# Altium PCB badge.PcbDoc
Units mm, origin at the board's own origin, x right, y up, seen from the top; angles counter-clockwise.
Board outline 105.3 x 112.16 mm, 2 copper layers (Top Layer, Bottom Layer), stack 1.569 mm thick; 94 components, 67 nets, 375 pads, 2 vias.
Unrouted connection lines stored in the file: 253.
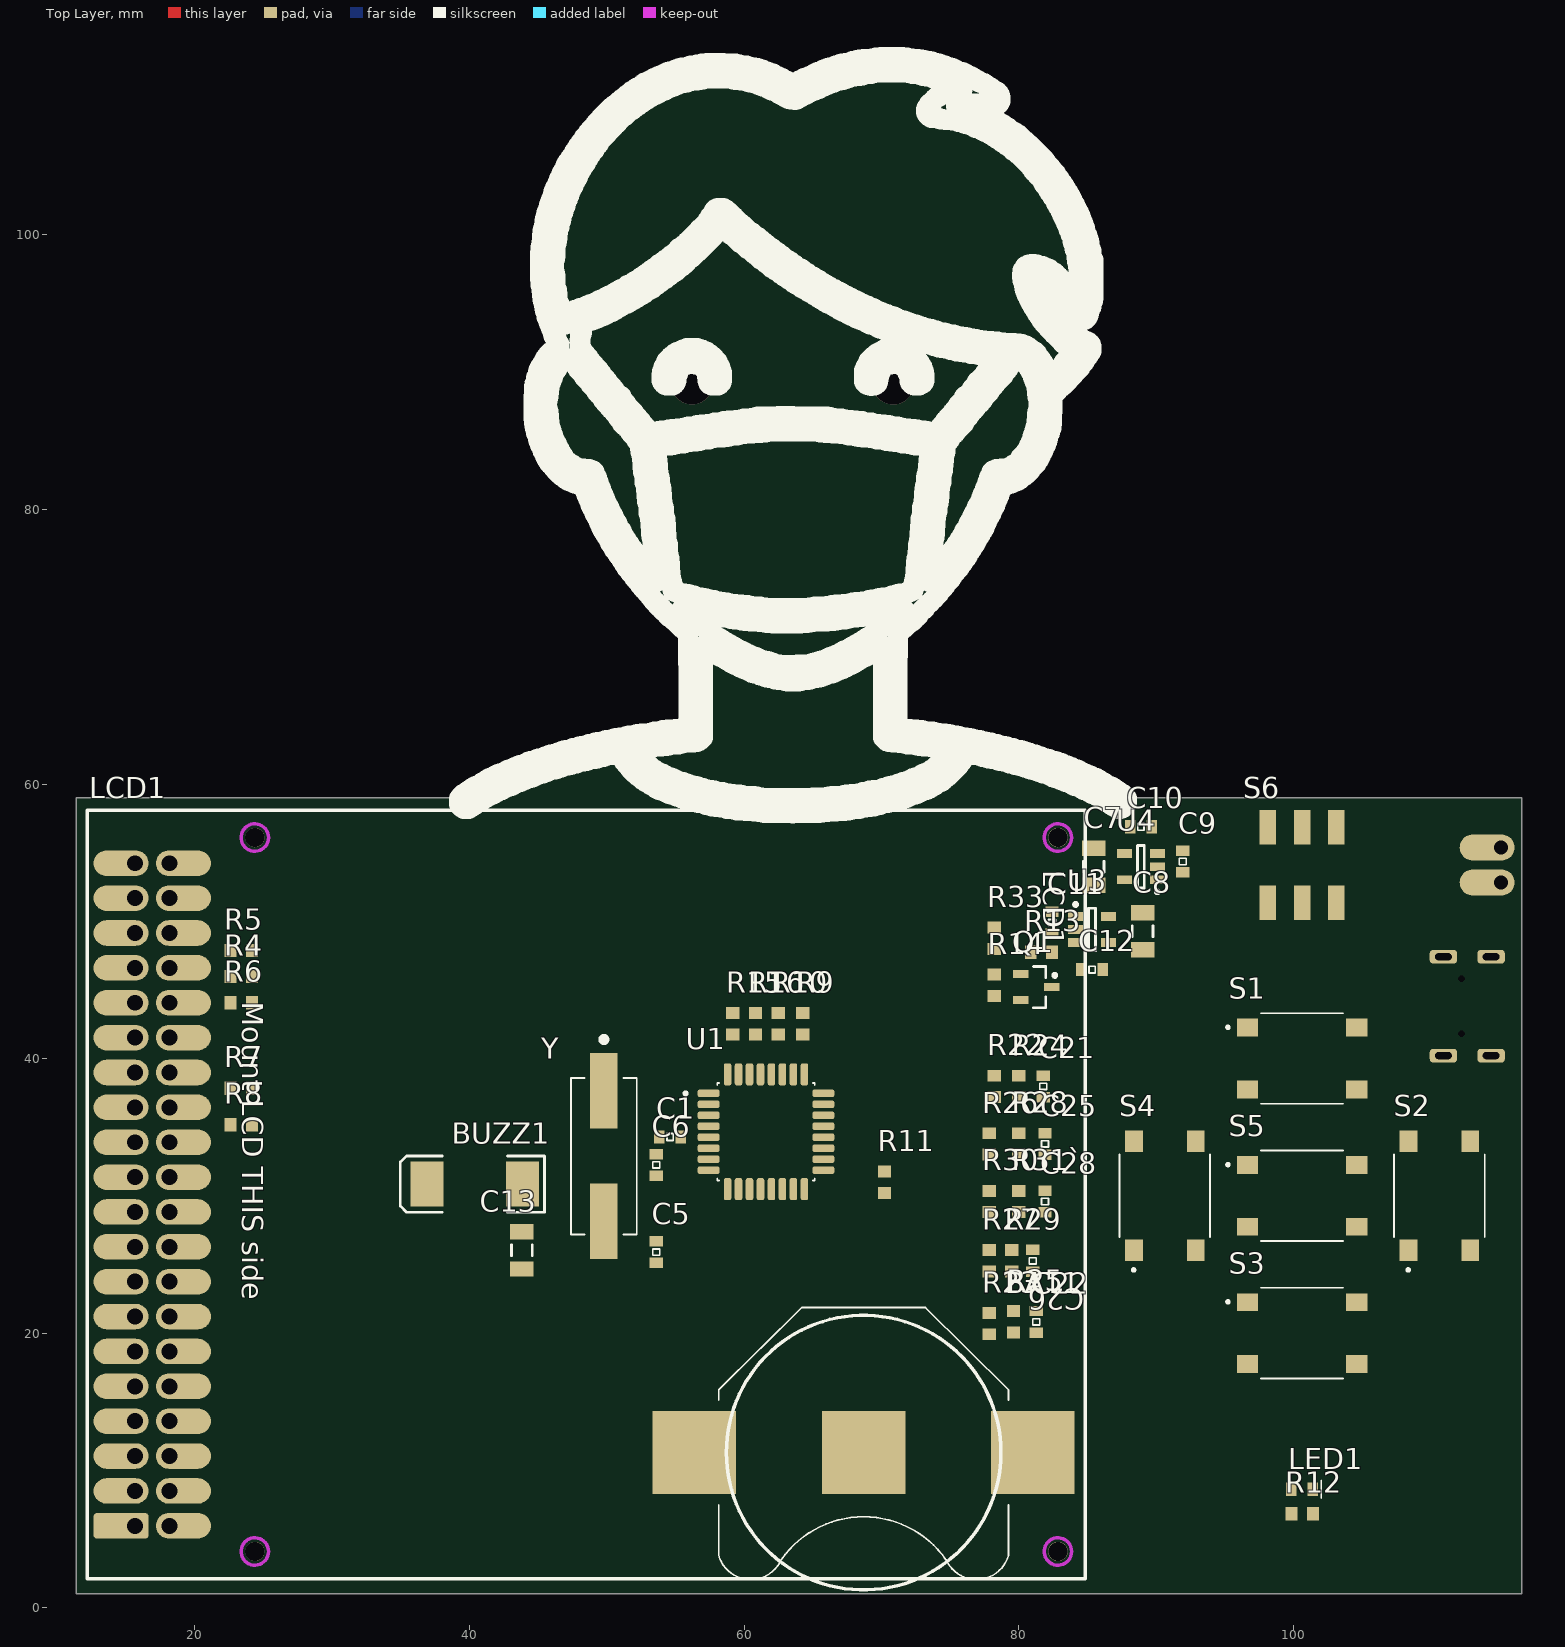
[diagram p0: Top Layer view]
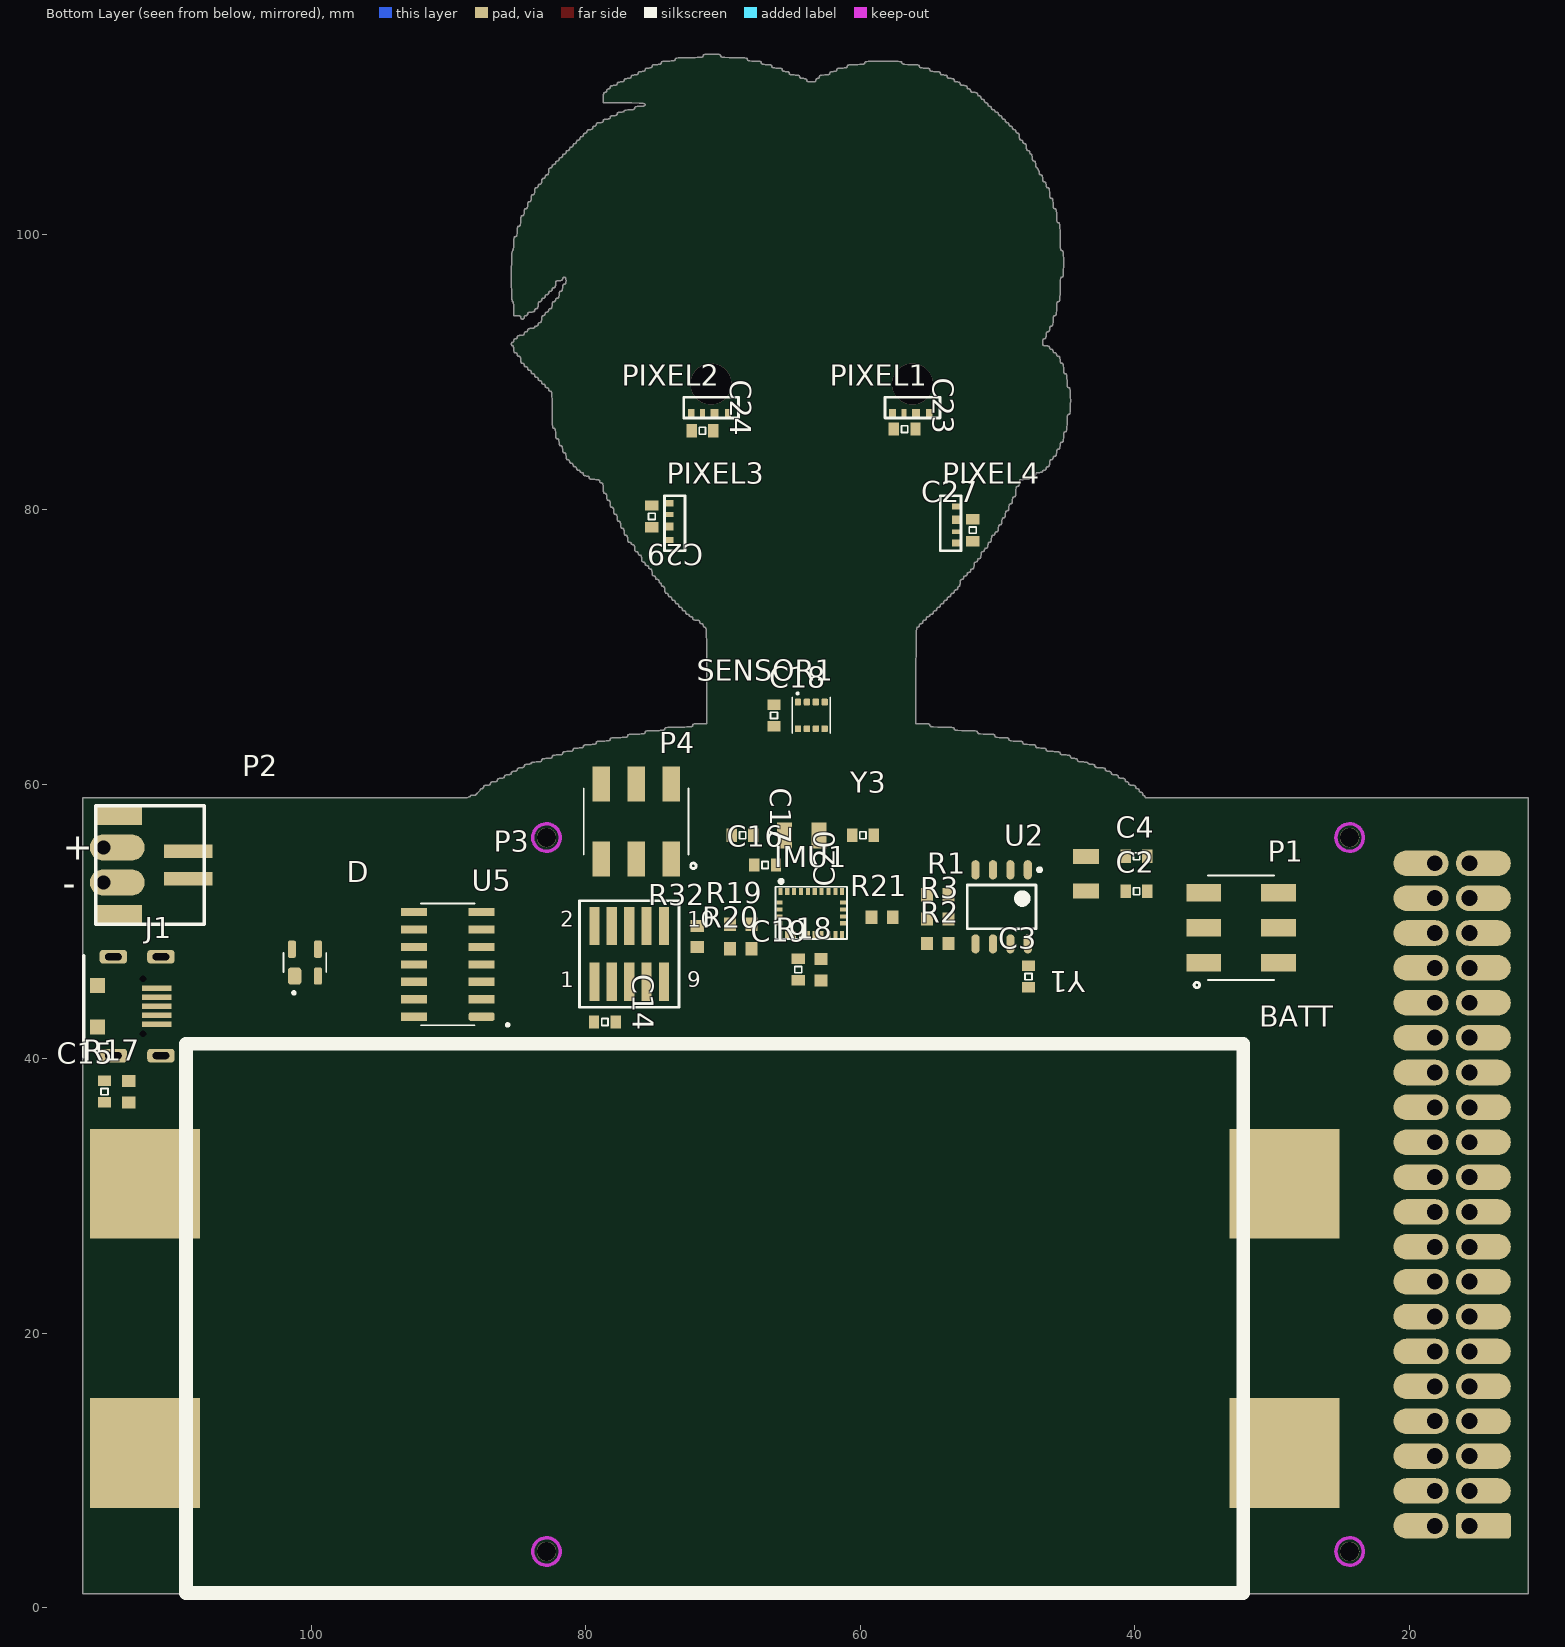
[diagram p1: Bottom Layer view, seen from below]

## Layer stack, top to bottom
Top Solder: solder mask 0.0254, SM-001, Dk 4
Top Layer: signal copper 0.035
Dielectric 1: core 1.4986, Core-043, Dk 4.3
Bottom Layer: signal copper 0.035
Bottom Solder: solder mask 0.0254, SM-001, Dk 4

## Board outline
2577 vertices, not listed, extent 11.342,1.007 116.646,113.17

## Design rules (kind name [scope] priority, off if disabled: settings)
Clearance [All] p1: gap=0.254 ignorepadtopadclearanceinfootprint=FALSE except(0: Arc-Hole Track-Hole SMDPad-Hole THPad-Hole Via-Hole Fill-Hole Poly-Hole Region-Hole Text-Hole; 0.18: SMDPad-SMDPad)
DiffPairsRouting [All] p1: maxlimit=0.254 minlimit=0.254 mostfreqgap=0.254 toplayer_minwidth=0.381 toplayer_maxwidth=0.381 toplayer_prefwidth=0.381 bottomlayer_minwidth=0.381 bottomlayer_maxwidth=0.381 bottomlayer_prefwidth=0.381 maxuncoupledlength=12.7
PolygonConnect [All] p1: connectstyle=Relief reliefconductorwidth=0.254 reliefentries=4 polygonreliefangle="90 Angle" airgapwidth=0.254
RoutingVias [All] p1: holewidth=0.711 width=1.27 viastyle="Through Hole" minholewidth=0.711 minwidth=1.27 maxholewidth=0.711 maxwidth=1.27
SolderMaskExpansion [All] p1: expansion=0.102 istentingtop=FALSE
Width [All] p1: maxlimit=0.254 minlimit=0.254 preferedwidth=0.254
29 further rules are at their usual default settings.

## Classes and differential pairs
component class badge: BAT1 C1 C2 C3 C4 C5 C6 LCD1 LED1 P1 R1 R2 R3 R4 R5 R6 R7 R8 R9 R10 R11 R12 U1 U2 Y Y1
component class badge5: C21 C22 C23 C24 C25 C26 C27 C28 C29 PIXEL1 PIXEL2 PIXEL3 PIXEL4 R22 R23 R24 R25 R26 R27 R28 R29 R30 R31` S1 S2 S3 S4 S5
component class badge4: C16 C17 C18 C19 C20 IMU1 R18 R19 R20 R21 SENSOR1 Y3
component class badge3: C14 C15 D J1 P3 P4 R15 R16 R17 R32 U5
component class badge2: BATT BUZZ1 C7 C8 C9 C10 C11 C12 C13 P2 Q1 R13 R14 R33 S6 U3 U4
differential pair USB_D: +USB_D_P -USB_D_N

## Components (designator, comment, footprint, x,y, rotation, side; value= is the part's Value field where it differs from the comment)
BAT1 "BK-883" BAT_BK-883 68.707,11.303 r180 top
BATT "BATT_18650x2" BATT_18650x2 70.612,21.082 r0 bottom locked
BUZZ1 "Speaker" SMC 40.386,30.861 r180 top
C1 "Cap" C0603 54.61,34.29 r0 top value=0.1uF
C2 "Cap" C0603 39.878,52.197 r0 bottom value=10pF
C3 "Cap" C0603 47.752,45.974 r90 bottom value=0.1uF
C4 "Cap" C0603 39.878,54.737 r0 bottom value=10pF
C5 "Cap" C0603 53.594,25.908 r270 top value=18pF
C6 "Cap" C0603 53.594,32.258 r270 top value=18pF
C7 "Cap1206" C1206 85.471,53.975 r270 top value=10uF
C8 "Cap1206" C1206 89.027,49.276 r90 top value=10uF
C9 "Cap0603" C0603 91.948,54.356 r90 top value=0.1uF
C10 "Cap0603" C0603 88.9,56.896 r180 top locked value=470pF
C11 "Cap0603" C0603 82.423,49.911 r90 top value=0.1uF
C12 "Cap0603" C0603 85.344,46.482 r0 top value=470pF
C13 "Cap1206" C1206 43.815,26.035 r270 top value=10uF
C14 "Cap0603" C0603 78.613,42.672 r180 bottom value=0.1uF
C15 "Cap0603" C0603 115.062,37.592 r90 bottom value=4.7nF
C16 "Cap0603" C0603 66.929,54.102 r180 bottom value=0.1uF
C17 "Cap" C0603 68.58,56.261 r180 bottom value=10pF
C18 "Cap0603" C0603 66.294,65 r270 bottom value=0.1uF
C19 "Cap0603" C0603 64.516,46.482 r90 bottom value=0.1uF
C20 "Cap" C0603 59.817,56.261 r0 bottom value=10pF
C21 "Cap0603" C0603 81.788,37.973 r90 top value=0.1uF
C22 "Cap0603" C0603 81.28,20.828 r90 top value=0.1uF
C23 "Cap0603" C0603 56.769,85.852 r180 bottom value=0.1uF
C24 "Cap0603" C0603 71.501,85.725 r180 bottom value=0.1uF
C25 "Cap0603" C0603 81.915,33.782 r270 top value=0.1uF
C26 "Cap0603" C0603 81.026,25.273 r270 top value=0.1uF
C27 "Cap0603" C0603 51.816,78.486 r90 bottom value=0.1uF
C28 "Cap0603" C0603 81.915,29.591 r90 top value=0.1uF
C29 "Cap0603" C0603 75.184,79.502 r270 bottom value=0.1uF
D "PRTR5V0U2X" SOT190P230X110-4N 100.457,46.99 r90 bottom
IMU1 "BNO055" LGA28R50P4X10_380X520X100 63.571,50.611 r180 bottom
J1 "MICROUSB_TAOBAO" MICROUSB_TAOBAO 116.562,43.815 r270 bottom
LCD1 "ER-TFTM024-3" ER-TFTM024-3 15.621,5.969 r270 top locked
LED1 "Blue" L0603 100.646,8.636 r0 top
P1 "95278-101A06LF" AMPHENOL_95278-101A06LF 32.258,49.53 r90 bottom
P2 "PWRIN" PWRIN 112.014,54.102 r180 bottom
P3 "SAMTEC-FTSH-105-01-X-DVJ" SAMTEC-FTSH-105-01-X-DV 76.835,47.625 r180 bottom
P4 "95278-101A06LF" AMPHENOL_95278-101A06LF 76.327,57.277 r0 bottom
PIXEL1 "WS2182B" WS2812B_SIDE 56.202,88.17 r0 bottom locked
PIXEL2 "WS2182B" WS2812B_SIDE 70.866,88.17 r0 bottom locked
PIXEL3 "WS2182B" WS2812B_SIDE 72.771,79 r90 bottom
PIXEL4 "WS2182B" WS2812B_SIDE 54.175,79 r270 bottom
Q1 "BSS138" SOT23_N 81.28,45.212 r0 top
R1 "Res" R0603 54.356,51.943 r180 bottom value=10k0
R2 "Res" R0603 54.356,48.387 r180 bottom value=4k75
R3 "Res" R0603 54.356,50.165 r180 bottom value=4k75
R4 "Res" R0603 23.386,45.974 r180 top value=22R
R5 "Res" R0603 23.368,47.879 r180 top value=22R
R6 "Res" R0603 23.368,44.069 r180 top value=22R
R7 "Res" R0603 23.368,37.846 r180 top value=22R
R8 "Res" R0603 23.368,35.179 r180 top value=22R
R9 "Res" R0603 64.262,42.545 r90 top value=22R
R10 "Res" R0603 62.484,42.545 r90 top value=10k
R11 "Res" R0603 70.231,30.988 r270 top value=10k
R12 "Res" R0603 100.646,6.858 r0 top value=470R
R13 "Res" R0603 81.661,47.752 r0 top value=100K
R14 "Res" R0603 78.232,45.339 r90 top value=100K
R15 "Res" R0603 59.182,42.545 r90 top value=1K
R16 "Res" R0603 60.833,42.545 r270 top value=1K
R17 "Res" R0603 113.284,37.592 r90 bottom value=1M
R18 "Res" R0603 62.865,46.482 r270 bottom value=10K
R19 "Res" R0603 68.707,49.784 r180 bottom value=10K
R20 "Res" R0603 68.707,48.006 r180 bottom value=10K
R21 "Res" R0603 58.42,50.292 r0 bottom value=10K
R22 "Res" R0603 78.232,37.973 r270 top value=12.1k
R23 "Res" R0603 77.851,20.701 r270 top value=12.1k
R24 "Res" R0603 80.01,37.973 r90 top value=43k
R25 "Res" R0603 79.629,20.828 r90 top value=43k
R26 "Res" R0603 77.851,33.782 r90 top value=12.1k
R27 "Res" R0603 77.851,25.273 r90 top value=12.1k
R28 "Res" R0603 80.01,33.782 r270 top value=43k
R29 "Res" R0603 79.502,25.273 r270 top value=43k
R30 "Res" R0603 77.851,29.591 r270 top value=12.1k
R31` "Res" R0603 80.01,29.591 r90 top value=43k
R32 "Res" R0603 71.882,48.895 r270 bottom value=10k
R33 "Res" R0603 78.232,48.768 r270 top value=0R
S1 "B3S-1000P" SW_B3S-1000P 100.646,40.007 r0 top locked
S2 "B3S-1000P" SW_B3S-1000P 110.646,30.007 r90 top locked
S3 "B3S-1000P" SW_B3S-1000P 100.646,20.007 r0 top locked
S4 "B3S-1000P" SW_B3S-1000P 90.646,30.007 r90 top locked
S5 "B3S-1000P" SW_B3S-1000P 100.646,30.007 r0 top locked
S6 "JS202011SCQN" SW_JS202011SCQN 100.646,54.102 r0 top locked
SENSOR1 "BME280" PSON65P250X250X100-8N 63.571,65 r90 bottom
U1 "ATMEGA328P-AUR" QFP80P900X900X120-32N 61.595,34.671 r0 top
U2 "MCP7940MT-I/SN" SOIC127P600X175-8N 49.704,51.054 r270 bottom
U3 "MIC5219BM5" SOT23-5_N 85.344,49.403 r0 top
U4 "MIC5219BM5" SOT23-5_N 88.9,53.975 r180 top
U5 "ATSAMD11C14A" SOIC127P600X175-14N 90.043,46.863 r0 bottom
Y "ABM3-16.000MHZ-B2-T" XTAL_ECS-100-20-5PVX 49.784,32.893 r270 top
Y1 "MC-405_32.7680K-D:_ROHS" XTAL320X150 43.561,53.467 r270 bottom
Y3 "MC-405_32.7680K-D:_ROHS" XTAL320X150 64.262,56.261 r0 bottom

## Footprints (in the part's own frame and the unit in brackets; to place one, negate y for a bottom-side part, rotate by r counter-clockwise, add the part's x,y. Pads: shape width x height; smd on the part's side, far side on the other; paste and mask are expansions set on the pad)
AMPHENOL_95278-101A06LF [mm]
  rect 1.27x2.54 smd: 1(-2.54,2.73) 2(-2.54,-2.73) 3(0,2.73) 4(0,-2.73) 5(2.54,2.73) 6(2.54,-2.73)
  silkscreen extent -4.37,-2.41 3.81,3.43, body extent -3.18,-1.71 3.17,1.72, height 5.8
BAT_BK-883 [mm]
  rect 6.07x6.07 smd paste-4: NEG(0,0)
  rect 6.07x6.07 smd: S1+(-12.33,0) S2+(12.33,0)
  silkscreen extent -10.56,-10.57 10.56,10, body extent -15.37,-10.41 15.36,9.4, height 3.96
BATT_18650x2 [mm]
  rect 8x8 smd: NEG1(41.5,9.8) NEG2(-41.5,-9.8) POS1(-41.5,9.8) POS2(41.5,-9.8)
  silkscreen extent -38.5,-20 38.5,20, body extent -43.1,-19.8 43.1,19.8, height 15
C0603 [mil]
  rect 30x38 smd: 1(-31,0) 2(31,0)
  silkscreen extent -9,-10 9,10, body extent -31,-16 31,16, height 36
C1206 [mm] "Chip Capacitor, Body 3.2x1.6mm, IPC High Density"
  rect 1.1x1.7 smd: 1(-1.35,0) 2(1.35,0)
  silkscreen extent -0.4,-0.75 0.4,0.75, body extent -1.7,-0.9 1.7,0.9, height 1.3
ER-TFTM024-3 [mm] "ER-TFTM024-3 TFT LCD Module"
  rrect25% 1.86x4 hole 1.16 copper offset 0,-1: 1(0,0)
  oval 1.86x4 hole 1.16 copper offset 0,1: 2(0,2.54) 4(-2.54,2.54) 6(-5.08,2.54) 8(-7.62,2.54) 10(-10.16,2.54) 12(-12.7,2.54) 14(-15.24,2.54) 16(-17.78,2.54) 18(-20.32,2.54) 20(-22.86,2.54) 22(-25.4,2.54) 24(-27.94,2.54) 26(-30.48,2.54) 28(-33.02,2.54) 30(-35.56,2.54) 32(-38.1,2.54) 34(-40.64,2.54) 36(-43.18,2.54) 38(-45.72,2.54) 40(-48.26,2.54)
  oval 1.86x4 hole 1.16 copper offset 0,-1: 3(-2.54,0) 5(-5.08,0) 7(-7.62,0) 9(-10.16,0) 11(-12.7,0) 13(-15.24,0) 15(-17.78,0) 17(-20.32,0) 19(-22.86,0) 21(-25.4,0) 23(-27.94,0) 25(-30.48,0) 27(-33.02,0) 29(-35.56,0) 31(-38.1,0) 33(-40.64,0) 35(-43.18,0) 37(-45.72,0) 39(-48.26,0)
  round 1.41 hole 1.4: H1(1.87,8.74) H2(1.87,67.24) H3(-50.13,8.74) H4(-50.13,67.24)
  Keep-Out Layer circle w0.254: c1.87,67.24 r1
  Keep-Out Layer circle w0.254: c1.87,8.74 r1
  Keep-Out Layer circle w0.254: c-50.13,8.74 r1
  Keep-Out Layer circle w0.254: c-50.13,67.24 r1
  silkscreen extent -52.13,-3.46 3.87,69.24, body extent -52.13,-3.46 3.87,69.24, height 12.6
L0603 [mil]
  rect 30x38 smd: 1(-31,0) 2(31,0)
  silkscreen extent 55,-25 55,25
LGA28R50P4X10_380X520X100 [mm]
  rect 0.3x0.525 smd: 1(-2.25,1.562) 6(-2.25,-1.562) 7(-1.75,-1.562) 8(-1.25,-1.562) 9(-0.75,-1.562) 10(-0.25,-1.562) 11(0.25,-1.562) 12(0.75,-1.562) 13(1.25,-1.562) 14(1.75,-1.562) 15(2.25,-1.562) 20(2.25,1.562) 21(1.75,1.562) 22(1.25,1.562) 23(0.75,1.562) 24(0.25,1.562) 25(-0.25,1.562) 26(-0.75,1.562) 27(-1.25,1.562) 28(-1.75,1.562)
  rect 0.425x0.3 smd: 2(-2.312,0.75) 3(-2.312,0.25) 4(-2.312,-0.25) 5(-2.312,-0.75) 16(2.312,-0.75) 17(2.312,-0.25) 18(2.312,0.25) 19(2.312,0.75)
  silkscreen extent -2.6,-1.9 2.6,2.4, body extent -2.6,-1.9 2.6,1.9, height 1.18
MICROUSB_TAOBAO [mm]
  rect 0.4x2.15 smd: 1(-1.3,5.31) 2(-0.65,5.31) 3(0,5.31) 4(0.65,5.31) 5(1.3,5.31)
  round 0 hole 0.5: H1(-2,4.3) H2(2,4.3)
  rrect50% 1x2 hole 0.5 slot 1.2 at 90 deg: S1(-3.6,2.15) S2(3.6,2.15) S3(-3.6,5.62) S4(3.6,5.62)
  rect 1.1x1.1 smd: S5(-1.5,1) S6(1.5,1)
  silkscreen extent -3.68,0 3.68,0
PSON65P250X250X100-8N [mm]
  rrect25% 0.49x0.45 smd: 1(0.97,0.975) 2(0.97,0.325) 3(0.97,-0.325) 4(0.97,-0.975) 5(-0.97,-0.975) 6(-0.97,-0.325) 7(-0.97,0.325) 8(-0.97,0.975)
  silkscreen extent -1.3,-1.39 1.65,1.39, body extent -1.25,-1.25 1.25,1.25, height 1
PWRIN [mm]
  oval 4x1.905 hole 1.016 copper offset 1,0: 1(-3.111,1.27) 2(-3.111,-1.27)
  rect 3.5x1 smd: 1(3.06,1) 2(3.06,-1)
  rect 3.4x1.4 smd: 3(-2.02,-3.62) 3(-2.02,3.62)
  silkscreen extent -3.69,-4.31 4.21,4.31
QFP80P900X900X120-32N [mm]
  rrect53% 1.6x0.55 smd: 1(-4.18,2.8) 2(-4.18,2) 3(-4.18,1.2) 4(-4.18,0.4) 5(-4.18,-0.4) 6(-4.18,-1.2) 7(-4.18,-2) 8(-4.18,-2.8) 17(4.18,-2.8) 18(4.18,-2) 19(4.18,-1.2) 20(4.18,-0.4) 21(4.18,0.4) 22(4.18,1.2) 23(4.18,2) 24(4.18,2.8)
  rrect53% 0.55x1.6 smd: 9(-2.8,-4.18) 10(-2,-4.18) 11(-1.2,-4.18) 12(-0.4,-4.18) 13(0.4,-4.18) 14(1.2,-4.18) 15(2,-4.18) 16(2.8,-4.18) 25(2.8,4.18) 26(2,4.18) 27(1.2,4.18) 28(0.4,4.18) 29(-0.4,4.18) 30(-1.2,4.18) 31(-2,4.18) 32(-2.8,4.18)
  silkscreen extent -5.95,-3.55 3.55,3.55, body extent -4.5,-4.5 4.5,4.5, height 1.2
R0603 [mm]
  rect 0.87x0.97 smd: 1(-0.78,0) 2(0.78,0)
  body extent -0.75,-0.4 0.75,0.4, height 0.5
SAMTEC-FTSH-105-01-X-DV [mil]
  rect 29.13x109.84 smd: 1(-100,-80) 2(-100,80) 3(-50,-80) 4(-50,80) 5(0,-80) 6(0,80) 7(50,-80) 8(50,80) 9(100,-80) 10(100,80)
  silkscreen extent -143,-153 143,153, body extent -130,-118 130,118, height 185
SMC [mm] "DO-214-AB/SMC; 2 C-Bend Leads; Body 7.9 x 5.9 mm, inc. leads (LxW)"
  rect 2.4x3.3 smd: 1(-3.475,0) 2(3.475,0)
  silkscreen extent -5.07,-2.05 5.43,2.05
SOIC127P600X175-8N [mm] "SOIC, 8-Leads, Body 4.90x3.90mm, Pitch 1.27mm, IPC Medium Density"
  oval 1.4x0.6 smd: 1(-2.7,1.905) 2(-2.7,0.635) 3(-2.7,-0.635) 4(-2.7,-1.905) 5(2.7,-1.905) 6(2.7,-0.635) 7(2.7,0.635) 8(2.7,1.905)
  silkscreen extent -2.82,-2.5 1.6,2.88, body extent -2,-2.5 2,2.5, height 1.75
SOIC127P600X175-14N [mm]
  rrect50% 1.9x0.6 smd: 1(-2.455,3.81)
  rect 1.9x0.6 smd: 2(-2.455,2.54) 3(-2.455,1.27) 4(-2.455,0) 5(-2.455,-1.27) 6(-2.455,-2.54) 7(-2.455,-3.81) 8(2.455,-3.81) 9(2.455,-2.54) 10(2.455,-1.27) 11(2.455,0) 12(2.455,1.27) 13(2.455,2.54) 14(2.455,3.81)
  silkscreen extent -4.45,-4.43 1.95,4.51
SOT23-5_N [mm] "SOT23, 6-Leads, Body 2.9x1.6mm, Pitch 0.95mm, Lead Span 2.7mm, IPC Medium Density"
  rect 1.1x0.65 smd: 1(-1.2,0.95) 2(-1.2,0) 3(-1.2,-0.95) 4(1.2,-0.95) 5(1.2,0.95)
  silkscreen extent -1.32,-1.55 0.25,1.95, body extent -1.4,-1.55 1.4,1.55, height 1.45
SOT23_N [mm] "SOT23, 3-Leads, Body 2.9x1.3mm, Pitch 0.95mm, Lead Span 2.3mm - Reverse Pinning, IPC Medium Density"
  rect 1.15x0.6 smd: 1(1.125,0) 2(-1.125,-0.95) 3(-1.125,0.95)
  silkscreen extent -0.2,-1.5 1.48,1.5, body extent -1.2,-1.5 1.2,1.5, height 1.2
SOT190P230X110-4N [mm]
  rrect50% 1.26x0.99 smd: 1(-0.98,0.75)
  rrect50% 1.26x0.59 smd: 2(-0.98,-0.95) 3(0.98,-0.95) 4(0.98,0.95)
  silkscreen extent -2.3,-1.56 0.7,1.56, body extent -1.02,-1.45 1.28,1.45, height 1.1
SW_B3S-1000P [mm]
  rect 1.55x1.3 smd: 1(-3.975,2.25) 2(3.975,2.25) 3(-3.975,-2.25) 4(3.975,-2.25)
  silkscreen extent -5.5,-3.3 3,3.3
SW_JS202011SCQN [mm]
  rect 1.2x2.5 smd: 1(-2.5,-2.75) 2(0,-2.75) 3(2.5,-2.75) 4(-2.5,2.75) 5(0,2.75) 6(2.5,2.75)
  body extent -4.5,-3.75 4.5,3.75, height 5.51
WS2812B_SIDE [mm]
  rect 0.45x0.65 smd: 1(-1.225,1.175)
  rect 0.6x0.65 smd: 2(-0.25,1.175)
  rect 0.35x0.65 smd: 3(0.625,1.175)
  rect 0.5x0.65 smd: 4(1.45,1.175)
  silkscreen extent -2,0 2,1.5
XTAL320X150 [mm]
  rect 1.1x1.9 smd: 1(-1.25,0) 2(1.25,0)
XTAL_ECS-100-20-5PVX [mm]
  rect 5.5x2 smd: 1(-4.75,0) 2(4.75,0)
  silkscreen extent -8.7,-2.4 5.7,2.4

## Part data
BAT1: "Battery Retainer Coin, 20.0mm 1 Cell SMD _SMT_ Tab", Package=None, Availability=Unavailable, MF="MPD _Memory", MP=BK-883-TR, Price=None, SnapEDA_Link=https://www.snapeda.com/parts/BK-883-TR/MPD%20%28Memory%20Protection%20Devices%29/view-part/386772/?ref=snap
BUZZ1: "Loudspeaker", LatestRevisionDate=17-Jul-2002, LatestRevisionNote="Re-released for DXP Platform.", PackageReference=PIN2, Published=24-Mar-1999, Publisher="Altium Limited"
C1 C2 C3 C4 C5 C6 C7 C8 C9 C10 C11 C12 C13 C14 C15 C16 C17 C18 C19 C20 C21 C22 C23 C24 C25 C26 C27 C28 C29: "Capacitor", LatestRevisionDate=17-Jul-2002, LatestRevisionNote="Re-released for DXP Platform.", PackageDescription="SMD Capacitor", Published=8-Jun-2000, Publisher="Altium Limited"
  C1 C2 C3 C4 C5 C6 C17 C20: PackageReference=RAD-0.3
  C7 C8 C13: PackageReference=1206
  C9 C10 C11 C12 C14 C15 C16 C18 C19 C21 C22 C23 C24 C25 C26 C27 C28 C29: PackageReference=0603
D: "Clamp Ipp Tvs Diode Surface Mount SOT-143B", Package="SOT-143 NXP Semiconductors", Availability=Unavailable, MF="NXP Semiconductors", MP=PRTR5V0U2X, Price=None, SnapEDA_Link=https://www.snapeda.com/parts/PRTR5V0U2X/NXP%20Semiconductors/view-part/4254511/?ref=snap
IMU1: "Accelerometer, Gyroscope, Magnetometer, 9 Axis Sensor IÂ²C, UART Output", Package="LGA-28 Bosch", Digi-Key_Part_Number=828-1058-1-ND, Digi-Key_Purchase_URL=https://www.digikey.com/product-detail/en/bosch-sensortec/BNO055/828-1058-1-ND/6136309?utm_source=snapeda&utm_medium=aggregator&utm_campaign=symbol, MF=Bosch, MP=BNO055, SnapEDA_Link=https://www.snapeda.com/parts/BNO055/Bosch%20Sensortec/view-part/51961/?ref=snap
LED1: library part LED, "Typical INFRARED GaAs LED", LatestRevisionDate=08-Jul-2005, LatestRevisionNote="Mech Layer 1 removed.", PackageDescription="LED; 2 Leads", PackageReference=LED-0, Published=8-Jun-2000, Publisher="Altium Limited"
P1 P4: "Connector Header Surface Mount 6 position 0.100 _2.54mm_", Package=None, Availability=Unavailable, MF="Amphenol ICC", MP=95278-101A06LF, Price=None, SnapEDA_Link=https://www.snapeda.com/parts/95278-101A06LF/Amphenol%20FCI/view-part/2763224/?ref=snap
Q1: library part MOSFET-N, "N-Channel MOSFET", LatestRevisionDate=17-Jul-2002, LatestRevisionNote="Re-released for DXP Platform.", PackageDescription="TO, Flat Index; 3 In-Line, Axial Leads; Body Dia. 4.6mm; Lead Dia. 0.5 mm (max)", PackageReference=E3, PackageVersion=1995/1996, Published=8-Jun-2000, Publisher="Altium Limited"
R1 R2 R3 R4 R5 R6 R7 R8 R9 R10 R11 R12 R13 R14 R15 R16 R17 R18 R19 R20 R21 R22 R23 R24 R25 R26 R27 R28 R29 R30 R31` R32 R33: "Resistor", LatestRevisionDate=17-Jul-2002, LatestRevisionNote="Re-released for DXP Platform.", PackageReference=AXIAL-0.4, Published=8-Jun-2000, Publisher="Altium Limited"
  R1 R2 R3 R4 R5 R6 R7 R8 R9: PackageDescription="Axial Device, Thru-Hole; 2 Leads; 0.4 in Pin Spacing"
  R10 R11 R12 R13 R14 R15 R16 R17 R18 R19 R20 R21 R22 R23 R24 R25 R26 R27 R28 R29 R30 R31` R32 R33: PackageDescription="SMD Resistor"
S1 S2 S3 S4 S5: "Tactile Switch SPST-NO Top Actuated Surface Mount", Package="SMD-4 Omron Electronics Inc-EMC Div", Availability=Unavailable, MF="Omron Electronics", MP=B3S-1000P, Price=None, SnapEDA_Link=https://www.snapeda.com/parts/B3S-1000P/Omron%20Electronics%20Inc-EMC%20Div/view-part/273491/?ref=snap
S6: "Slide Switch DPDT Surface Mount", Package=None, Digi-Key_Part_Number=401-2002-1-ND, Digi-Key_Purchase_URL=https://www.digikey.com/product-detail/en/c-k/JS202011SCQN/401-2002-1-ND/1640098?utm_source=snapeda&utm_medium=aggregator&utm_campaign=symbol, MF=C&K, MP=JS202011SCQN, SnapEDA_Link=https://www.snapeda.com/parts/JS202011SCQN/C%26K/view-part/592122/?ref=snap
SENSOR1: "Humidity Temperature Sensor 0 ~ 100% RH IÂ²C, SPI Â±3% 1s Surface Mount", Package="LGA-8 Bosch", Availability=Unavailable, MF=Bosch, MP=BME280, Price=None, SnapEDA_Link=https://www.snapeda.com/parts/BME280/Bosch%20Sensortec/view-part/49769/?ref=snap
U1: "AVR AVRÂ® ATmega Microcontroller IC 8-Bit 20MHz 32KB _16K x 16_ FLASH 32-TQFP _7x7_", Package="TQFP-32 Microchip", Digi-Key_Part_Number=ATMEGA328P-AURCT-ND, Digi-Key_Purchase_URL=https://www.digikey.com/product-detail/en/microchip-technology/ATMEGA328P-AUR/ATMEGA328P-AURCT-ND/3789455?utm_source=snapeda&utm_medium=aggregator&utm_campaign=symbol, MF=Microchip, MP=ATMEGA328P-AUR, SnapEDA_Link=https://www.snapeda.com/parts/ATMEGA328P-AUR/Microchip/view-part/1212624/?ref=snap
U2: "Real Time Clock _RTC_ IC Clock/Calendar 64B IÂ²C, 2-Wire Serial 8-SOIC _0.154, 3.90mm Width_", Package="SO-8 Microchip", Availability=Unavailable, MF=Microchip, MP=MCP7940MT-I/SN, Price=None, SnapEDA_Link=https://www.snapeda.com/parts/MCP7940MT-I/SN/Microchip/view-part/1118394/?ref=snap
U3 U4: "Linear Voltage Regulator IC 1 Output 500mA SOT-23-5", Package="SOT-753 Micrel", Availability=Unavailable, MF=Micrel, MP=MIC5219BM5, Price=None, SnapEDA_Link=https://www.snapeda.com/parts/MIC5219BM5/Micrel/view-part/553192/?ref=snap
Y: "16MHz Â±20ppm Crystal 18pF 40 Ohms 2-SMD, No Lead", Package="SMD-2 Abracon", Digi-Key_Part_Number=535-9103-1-ND, Digi-Key_Purchase_URL=https://www.digikey.com/product-detail/en/abracon-llc/ABM3-16.000MHZ-B2-T/535-9103-1-ND/675620?utm_source=snapeda&utm_medium=aggregator&utm_campaign=symbol, MF=Abracon, MP=ABM3-16.000MHZ-B2-T, SnapEDA_Link=https://www.snapeda.com/parts/ABM3-16.000MHZ-B2-T/Abracon%20LLC/view-part/55266/?ref=snap
Y1 Y3: "32.768kHz Â±20ppm Crystal 35 kOhms 4-SOJ, 2.29mm pitch", Package="4-4 EPSON", Availability=Unavailable, MF=EPSON, MP="MC-405 32.7680K-D: ROHS", Price=None, SnapEDA_Link=https://www.snapeda.com/parts/MC-405%2032.7680K-D:%20ROHS/EPSON/view-part/3612388/?ref=snap

## Via types
v1: diameter 3, hole 3, Top Layer to Bottom Layer, 2 vias

## Nets (pads, with @x,y where several pads share a name; then routed paths per layer and width w, separated by ;. In a path a pad name is that pad's centre, name@x,y a point inside that pad or via, vN(x,y) a via of type N, cw(c..) or ccw(c..) an arc to the next point about the centre after c; other vN are vias at no path point)
A2_FONTCS#: LCD1.36 U1.25
A3_PIXEL_DATA_R: R9.1 U1.26
BUZZ1: BUZZ1.1 C13.1
D2_LCD_DC_R: R7.1 U1.32
D3_SW1: C21.2 R22.1 R24.2 S1.1 S1.2 U1.1
D4_SW2: C26.2 R27.1 R29.2 S2.1 S2.2 U1.2
D5_SW3: C22.2 R23.1 R25.2 S3.1 S3.2 U1.9
D6_SW4: C25.2 R26.1 R28.2 S4.1 S4.2 U1.10
D7_SW5: C28.2 R30.1 R31`.2 S5.1 S5.2 U1.11
D8_LED: LED1.1 U1.12
D9_BUZZER1: C13.2 U1.13
D10_LCD_CSn_R: R8.1 U1.14
GND: BAT1.NEG BATT.NEG2 BUZZ1.2 C1.1 C2.1 C3.1 C4.1 C5.2 C6.1 C7.1 C8.1 C9.1 C10.1 C11.1 C12.1 C14.2 C15.1 C16.1 C17.1 C18.1 C19.1 C20.1 C21.1 C22.1 C23.1 C24.1 C25.1 C26.1 C27.1 C28.1 C29.1 D.1 IMU1.2 IMU1.15 IMU1.16 IMU1.18 IMU1.25 J1.5 LCD1.40 P1.6 P2.2 P3.3 P3.5 P4.6 PIXEL1.4 PIXEL2.4 PIXEL3.4 PIXEL4.4 Q1.2 R12.1 R14.1 R17.1 R19.1 R20.1 R21.1 R24.1 R25.1 R28.1 R29.1 R31`.1 S1.3 S1.4 S2.3 S2.4 S3.3 S3.4 S4.3 S4.4 S5.3 S5.4 SENSOR1.1 SENSOR1.5 SENSOR1.7 U1.3 U1.5 U1.21 U2.4 U3.2 U4.2 U5.11
IMU1_CAP: C19.2 IMU1.9
IMU1_COM3: IMU1.17 R21.2
IMU1_INT: IMU1.14 U1.23
IMU1_NRESET: IMU1.11 R18.1
IMU1_PS0: IMU1.6 R20.2
IMU1_PS1: IMU1.5 R19.2
IMU1_XIN: C17.2 IMU1.27 Y3.2
IMU1_XOUT: C20.2 IMU1.26 Y3.1
LCD_CLK: LCD1.24 LCD1.33 R5.2
LCD_CSn: LCD1.23 R8.2
LCD_DC: LCD1.25 R7.2
LCD_SDI: LCD1.27 LCD1.34 R4.2
LCD_SDO: LCD1.28 LCD1.32 R6.2
LED1_C: LED1.2 R12.2
MEGA_RST#: P1.5 R10.1 U1.29 U5.3
MEGA_RXD: R16.2 U1.30
MEGA_TXD: R15.1 U1.31
MISO: P1.1 R6.1 U1.16
MOSI: P1.4 R4.1 U1.15
NetBATT_NEG1: BATT.NEG1 BATT.POS2
NetP2_1: P2.1 S6.1 S6.4
PIXEL_DATA: PIXEL1.1 R9.2
PIXEL_DATA_1: PIXEL1.3 PIXEL2.1
PIXEL_DATA_2: PIXEL2.3 PIXEL3.1
PIXEL_DATA_3: PIXEL3.3 PIXEL4.1
PWRIN_POS: BATT.POS1 S6.2 S6.5
RSTn: P3.10 R32.1 U5.6
RTC_INT: R1.2 U1.24 U2.7
SAMD11_PA02: P4.2 U5.13
SAMD11_PA08: P4.3 U5.2
SAMD11_PA14: P4.4 U5.4
SAMD11_PA15: P4.5 U5.5
SAMD11_RXD: R15.2 U5.1
SAMD11_TXD: R16.1 U5.14
SCK: P1.3 R5.1 R11.1 U1.17
SCL: IMU1.19 R3.2 SENSOR1.4 U1.28 U2.6
SDA: IMU1.20 R2.2 SENSOR1.3 U1.27 U2.5
SH_GND: C15.2 J1.S1 J1.S2 J1.S3 J1.S4 J1.S5 J1.S6 R17.2
SWDCLK: P3.4 U5.7
SWDIO: P3.2 U5.8
U2_VBAT: BAT1.S1+ BAT1.S2+ U2.3
U2_X1: C2.2 U2.1 Y1.2
U2_X2: C4.2 U2.2 Y1.1
U3_ADJ: C12.2 U3.4
U3_EN: Q1.1 R13.2 U3.3
U4_ADJ: C10.2 U4.4
USB_D_N: D.3 J1.2 U5.9
USB_D_P: D.2 J1.3 U5.10
VBAT: C11.2 R13.1 S6.3 S6.6 U3.1
VBUS: D.4 J1.1 Q1.3 R14.2 R33.2
VCC_3V3: C1.2 C3.2 C7.2 C14.1 C16.2 C18.2 IMU1.3 IMU1.4 IMU1.28 LCD1.2 LCD1.29 P1.2 P3.1 P4.1 R1.1 R2.1 R3.1 R10.2 R11.2 R18.2 R22.2 R23.2 R26.2 R27.2 R30.2 R32.2 SENSOR1.2 SENSOR1.6 SENSOR1.8 U1.4 U1.6 U1.18 U2.8 U4.5 U5.12
VCC_5V0: C8.2 C9.2 C23.2 C24.2 C27.2 C29.2 PIXEL1.2 PIXEL2.2 PIXEL3.2 PIXEL4.2 R33.1 U3.5 U4.1 U4.3
XTAL1: C6.2 U1.7 Y.2
XTAL2: C5.1 U1.8 Y.1
pads on no net: IMU1.1 IMU1.7 IMU1.8 IMU1.10 IMU1.12 IMU1.13 IMU1.21 IMU1.22 IMU1.23 IMU1.24 J1.4 J1.H1 J1.H2 LCD1.1 LCD1.3 LCD1.4 LCD1.5 LCD1.6 LCD1.7 LCD1.8 LCD1.9 LCD1.10 LCD1.11 LCD1.12 LCD1.13 LCD1.14 LCD1.15 LCD1.16 LCD1.17 LCD1.18 LCD1.19 LCD1.20 LCD1.21 LCD1.22 LCD1.26 LCD1.30 LCD1.31 LCD1.35 LCD1.37 LCD1.38 LCD1.39 LCD1.H1 LCD1.H2 LCD1.H3 LCD1.H4 P2.3 P3.6 P3.7 P3.8 P3.9 PIXEL4.3 U1.19 U1.20 U1.22
copper on no net:
  other v1: 56.202,89.136 70.866,89.136

## Polygon pours and split planes (outlines as drawn)
no net on Top Solder (solid): 54.107,83.936 60.05,85.198 63.638,85.466 72.903,83.936 71.74,74.545 66.163,73.25 61.584,73.167 55.12,74.674
no net on Bottom Solder (solid): 54.107,83.936 60.05,85.198 63.638,85.466 72.903,83.936 71.74,74.545 66.163,73.25 61.584,73.167 55.12,74.674

## Silkscreen, mask and mechanical layers (free items; w line width, h text height)
Top Overlay:
  drawing of 7922 lines, arcs and shapes, not listed
Mechanical 3:
  drawing of 1556 lines, arcs and shapes, not listed

## Text inside footprints (layer, text, board x,y; h text height)
LCD1: Top Overlay "Mount LCD THIS side" at 23.464,44.129 h1.52 r270
P2: Bottom Overlay "-" at 118.11,51.816 h1.91; Bottom Overlay "+" at 118.11,54.483 h1.91
P3: Bottom Overlay "1" at 81.866,44.78 h1.97; Bottom Overlay "2" at 81.866,49.2 h1.97; Bottom Overlay "9" at 72.604,44.78 h1.97; Bottom Overlay "10" at 72.604,49.2 h1.97; Mechanical 40 "4.064" at 85.052,47.498 h0.39; Mechanical 40 "3.429" at 86.893,47.498 h0.39; Mechanical 40 "1.270" at 82.004,52.451 h0.39; Mechanical 40 "6.350" at 77.495,48.768 h0.39; Mechanical 40 "5.080" at 77.495,53.467 h0.39; Mechanical 40 "2.794" at 72.923,49.53 h0.39; Mechanical 40 "0.762" at 72.606,51.753 h0.39; Mechanical 16 "1" at 81.866,44.78 h1.97; Mechanical 16 "2" at 81.866,49.2 h1.97; Mechanical 16 "9" at 72.604,44.78 h1.97; Mechanical 16 "10" at 72.604,49.2 h1.97